# Altium PCB Display_System_pcb.PcbDoc (part 3 of 3)
Units mm, origin at the board's own origin, x right, y up, seen from the top; angles counter-clockwise.
Board outline 72.5 x 81 mm, 4 copper layers (Top Layer, VCC, GND, Bottom Layer); 86 components, 79 nets, 327 pads, 149 vias.
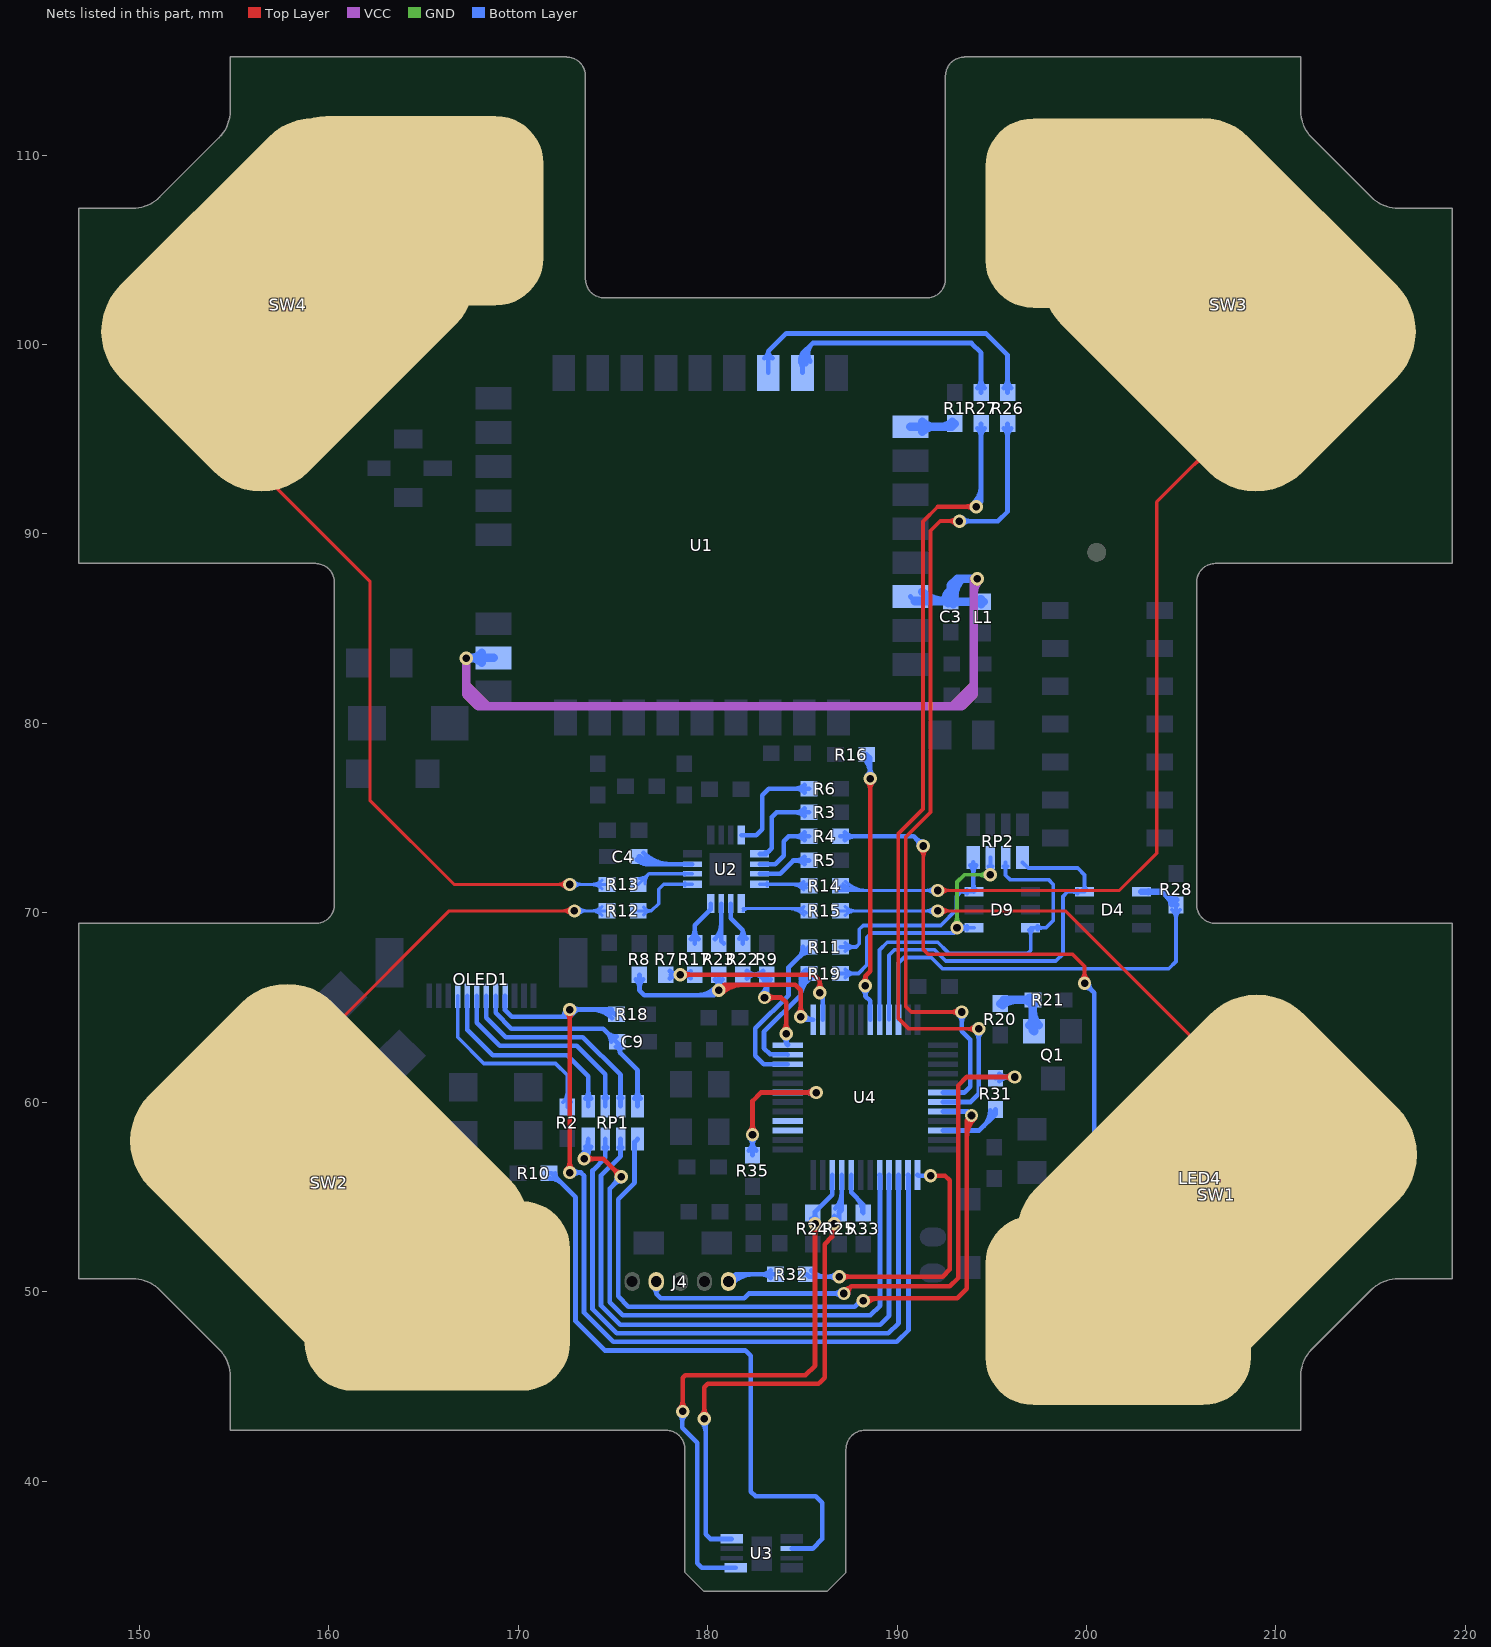
[diagram p5: the nets of this part, all layers, seen from the top]

## Via types
v1: diameter 0.7, hole 0.4, Top Layer to Bottom Layer, tented both sides, 149 vias

## Nets (pads, with @x,y where several pads share a name; then routed paths per layer and width w, separated by ;. In a path a pad name is that pad's centre, name@x,y a point inside that pad or via, vN(x,y) a via of type N, cw(c..) or ccw(c..) an arc to the next point about the centre after c; other vN are vias at no path point) (continued)
NetLED4_1: LED4.1 R4.2 | length 43.8
  Top Layer w0.2: v1@191.212,73.356 cw(c190.785,72.929) 191.389,72.929 cw(c191.993,72.929) v1@191.566,73.356 ; v1(191.389,73.533) 191.389,68.072 191.643,67.818 199.263,67.818 199.898,67.183 v1(199.898,66.294) ; v1@199.721,66.471 ccw(c199.294,66.898) 199.898,66.898 ccw(c200.502,66.898) v1@200.075,66.471
  Bottom Layer w0.25: R4.2@187.007,74.041 190.881,74.041 v1(191.389,73.533) ; R4.2@187.245,73.842 cw(c187.725,73.362) 187.725,74.041 cw(c187.725,74.72) R4.2@187.245,74.24 ; v1@191.164,73.533 ccw(c190.621,73.533) 191.005,73.917 ccw(c191.389,74.301) v1@191.389,73.758 ; v1@199.898,66.069 cw(c199.898,65.526) 200.282,65.91 cw(c200.666,66.294) v1@200.123,66.294 ; v1(199.898,66.294) 200.406,65.786 200.406,58.42 200.66,58.166 207.391,58.166 207.772,57.785 LED4.1@207.772,56.134 ; LED4.1@207.411,56.495 ccw(c206.541,57.365) 207.772,57.365 ccw(c209.003,57.365) LED4.1@208.133,56.495
NetOLED1_6: OLED1.6 RP1.3 | length 11.6
  Bottom Layer w0.25: OLED1.6@168.315,65.62 168.315,64.476 169.349,63.442 173.413,63.442 175.406,61.449 RP1.3@175.406,59.793 ; RP1.3@175.318,60.231 ccw(c175.104,60.445) 175.406,60.445 ccw(c175.708,60.445) RP1.3@175.494,60.231
NetOLED1_7: OLED1.7 RP1.2 | length 11.5
  Bottom Layer w0.25: OLED1.7@167.815,65.62 167.815,64.214 169.037,62.992 173.101,62.992 174.606,61.487 RP1.2@174.606,59.793 ; RP1.2@174.518,60.231 ccw(c174.304,60.445) 174.606,60.445 ccw(c174.908,60.445) RP1.2@174.694,60.231
NetOLED1_8: OLED1.8 RP1.1 | length 11.6
  Bottom Layer w0.25: OLED1.8@167.315,65.62 167.315,63.825 168.656,62.484 172.593,62.484 173.706,61.371 RP1.1@173.706,59.793 ; RP1.1@173.547,60.202 ccw(c173.163,60.586) 173.706,60.586 ccw(c174.249,60.586) RP1.1@173.865,60.202
NetOLED1_9: OLED1.9 R2.2 | length 15.8
  Bottom Layer w0.152: 168.549,62.083 171.978,62.083 172.466,61.595
  Bottom Layer w0.2: OLED1.9@166.815,65.62 166.815,63.436 168.192,62.059 171.978,62.059 172.593,61.444 R2.2@172.593,59.753 ; R2.2@172.376,60.008 ccw(c171.853,60.531) 172.593,60.531 ccw(c173.333,60.531) R2.2@172.81,60.008
NetQ1_1: Q1.1 R20.1 R21.2 | length 6.9
  Bottom Layer w0.45: R20.1@195.453,65.215 195.643,65.405 R21.2@197.167,65.405 197.167,63.817 Q1.1@197.231,63.754 ; R20.1@195.581,65.124 cw(c196.259,64.447) 196.259,65.405 ; Q1.1@196.986,64.063 ccw(c196.548,64.501) 197.167,64.501 ; R21.2@197.001,65.277 ccw(c196.691,64.967) 196.691,65.405 ccw(c196.691,65.843) R21.2@197.001,65.533 ; R21.2@197.039,65.277 cw(c196.73,64.967) 197.167,64.967 cw(c197.605,64.967) R21.2@197.296,65.277 ; 197.167,64.807 ccw(c198.221,64.807) Q1.1@197.476,64.063
NetR1_2: R1.2 U1.18 | length 4.5
  Bottom Layer w0.45: U1.18@190.705,95.658 192.876,95.658 R1.2@193.04,95.822 ; U1.18@191.32,95.393 cw(c191.96,94.753) 191.96,95.658 cw(c191.96,96.563) U1.18@191.32,95.923 ; 192.299,95.658 ccw(c192.299,96.524) R1.2@192.912,95.912
NetR12_1: pad.0@165.735,49.784 R12.1 SW2.1 | length 20.5
  Top Layer w0.17: SW2.1@160.02,63.754 166.37,70.104 v1(172.974,70.104) ; v1@172.787,69.917 ccw(c172.334,69.464) 172.334,70.104 ccw(c172.334,70.744) v1@172.787,70.291
  Bottom Layer w0.17: v1(172.974,70.104) R12.1@174.689,70.104 ; v1@173.161,69.917 cw(c173.614,69.464) 173.614,70.104 cw(c173.614,70.744) v1@173.161,70.291 ; R12.1@174.423,69.877 ccw(c173.874,69.328) 173.874,70.104 ccw(c173.874,70.88) R12.1@174.423,70.331
NetR12_2: R12.2 U2.1 | length 5.3
  Bottom Layer w0.17: R12.2@176.339,70.104 177.038,70.104 ; R12.2@176.631,69.906 cw(c177.038,69.586) 177.038,70.104 ; R12.2@176.631,70.302 ccw(c177.038,70.622) 177.038,70.104 ; U2.1@178.816,71.433 ccw(c178.619,71.237) 178.619,71.515 ccw(c178.619,71.792) U2.1@178.816,71.596 ; U2.1@179.197,71.515 177.687,71.515 177.419,71.247 177.419,70.485 177.038,70.104
NetR13_1: pad.0@164.338,107.061 R13.1 SW4.1 | length 38.7
  Top Layer w0.17: SW4.1@155.385,94.297 161.671,88.011 162.179,87.503 162.179,76.454 162.179,75.946 166.624,71.501 v1(172.72,71.501) ; v1@172.533,71.314 ccw(c172.08,70.861) 172.08,71.501 ccw(c172.08,72.141) v1@172.533,71.688
  Bottom Layer w0.17: v1(172.72,71.501) R13.1@174.689,71.501 ; v1@172.907,71.314 cw(c173.36,70.861) 173.36,71.501 cw(c173.36,72.141) v1@172.907,71.688 ; R13.1@174.423,71.274 ccw(c173.874,70.725) 173.874,71.501 ccw(c173.874,72.277) R13.1@174.423,71.728
NetR13_2: R13.2 U2.2 | length 4.5
  Bottom Layer w0.17: R13.2@176.339,71.501 176.903,72.064 ; R13.2@176.378,71.822 ccw(c176.378,72.506) 176.861,72.023 ; R13.2@176.698,71.522 cw(c177.401,71.567) 176.903,72.064 ; U2.2@178.801,72.019 ccw(c178.69,71.908) 178.69,72.064 ccw(c178.69,72.221) U2.2@178.801,72.11 ; U2.2@179.197,72.064 176.903,72.064
NetR14_1: R14.1 U2.12 | length 4.8
  Bottom Layer w0.17: U2.12@182.753,71.515 R14.1@185.356,71.515 ; U2.12@183.134,71.433 cw(c183.331,71.237) 183.331,71.515 cw(c183.331,71.792) U2.12@183.134,71.596 ; 184.357,71.515 cw(c184.357,70.476) R14.1@185.091,71.21 ; 184.728,71.515 ccw(c184.728,72.028) R14.1@185.091,71.665 ; 184.767,71.515 cw(c184.767,70.886) R14.1@185.211,71.33
NetR14_2: pad.0@201.676,106.934 R14.2 SW3.1 | length 49
  Top Layer w0.17: v1(192.151,71.183) 201.739,71.183 203.708,73.152 203.708,91.694 SW3.1@206.058,94.043 ; v1@192.338,70.996 cw(c192.791,70.544) 192.791,71.183 cw(c192.791,71.823) v1@192.338,71.371 ; 205.592,93.578 cw(c206.745,92.425) SW3.1@207.162,94.001 ; 205.801,93.787 cw(c206.832,92.756) SW3.1@207.206,94.166 ; SW3.1@206.01,93.996 cw(c206.92,93.086) SW3.1@207.249,94.33
  Bottom Layer w0.17: R14.2@186.817,71.183 v1@192.088,71.183 ; R14.2@187.032,71.424 ccw(c187.614,72.006) 187.614,71.183 ; R14.2@187.153,71.545 ccw(c188.024,72.416) 188.024,71.183 ; R14.2@187.273,71.665 ccw(c188.435,72.827) 188.435,71.183 ; v1@191.964,70.996 ccw(c191.511,70.544) 191.511,71.183 ccw(c191.511,71.823) v1@191.964,71.371
NetR15_1: R15.1 U2.13 | length 5.4
  Bottom Layer w0.17: U2.13@181.864,70.231 R15.1@185.039,70.231 ; U2.13@181.868,70.104 cw(c182.176,69.796) 182.176,70.231 ; 184.236,70.231 cw(c184.236,69.021) R15.1@185.091,69.877 ; 184.646,70.231 cw(c184.646,69.432) R15.1@185.211,69.997 ; 184.849,70.231 ccw(c184.849,70.573) R15.1@185.091,70.331
NetR15_2: pad.0@201.676,49.022 R15.2 SW1.1 | length 34.7
  Top Layer w0.17: v1(192.151,70.104) 198.882,70.104 SW1.1@207.609,61.377 ; v1@192.338,69.917 cw(c192.791,69.464) 192.791,70.104 cw(c192.791,70.744) v1@192.338,70.291
  Top Layer w0.25: SW1.1@206.757,54.692 SW1.1@206.83,54.692
  Top Layer w0.45: SW1.1@206.808,54.605 206.885,54.605 207.609,55.329 SW1.1@207.609,61.377
  Bottom Layer w0.17: R15.2@187.007,70.104 v1(192.151,70.104) ; R15.2@187.273,69.877 cw(c187.822,69.328) 187.822,70.104 cw(c187.822,70.88) R15.2@187.273,70.331 ; v1@191.964,69.917 ccw(c191.511,69.464) 191.511,70.104 ccw(c191.511,70.744) v1@191.964,70.291
NetR17_1: R17.1 U2.16 | length 3.5
  Bottom Layer w0.25: R17.1@179.125,68.627 ccw(c178.645,69.107) 179.324,69.107 ccw(c180.003,69.107) R17.1@179.523,68.627 ; R17.1@179.324,68.389 179.324,69.342 180.163,70.181 U2.16@180.163,70.485
NetR22_2: R22.2 U2.14 | length 3.4
  Bottom Layer w0.25: U2.14@181.229,70.485 181.229,69.723 181.864,69.088 ; R22.2@181.669,68.631 ccw(c181.23,69.088) 181.864,69.088 ; R22.2@181.864,68.389 181.864,69.088 ; R22.2@182.059,68.631 cw(c182.498,69.088) 181.864,69.088
NetR23_2: R23.2 U2.15 | length 3
  Bottom Layer w0.25: R23.2@180.395,68.627 ccw(c179.608,69.414) 180.721,69.414 ; U2.15@180.721,70.485 180.721,68.516 R23.2@180.848,68.389
NetR26_2: R26.2 U1.15 | length 18.5
  Bottom Layer w0.25: U1.15@182.987,99.28 ccw(c182.8,99.639) 183.205,99.639 ; U1.15@183.205,98.508 183.205,99.639 ; U1.15@183.423,99.28 cw(c183.61,99.639) 183.205,99.639 ; R26.2@195.635,97.71 ccw(c195.155,98.19) 195.834,98.19 ccw(c196.513,98.19) R26.2@196.033,97.71 ; R26.2@195.834,97.472 195.834,99.441 194.691,100.584 184.15,100.584 183.205,99.639
NetR27_2: R27.2 U1.16 | length 16.9
  Bottom Layer w0.25: U1.16@184.983,98.846 cw(c185.536,99.163) 185.085,99.614 ; U1.16@185.005,98.508 185.005,99.534 185.547,100.076 ; U1.16@185.2,98.97 cw(c185.829,99.332) 185.316,99.845 ; U1.16@185.417,99.095 cw(c186.123,99.5) 185.547,100.076 ; R27.2@194.238,97.71 ccw(c193.758,98.19) 194.437,98.19 ccw(c195.116,98.19) R27.2@194.636,97.71 ; R27.2@194.437,97.472 194.437,99.568 193.929,100.076 185.547,100.076
NetR31_2: R31.2 U4.34 | length 4.8
  Bottom Layer w0.25: U4.34@192.43,58.517 194.344,58.517 195.199,59.372 R31.2@195.199,59.627 ; 194.566,58.739 ccw(c193.717,59.588) R31.2@194.918,59.588 ; 194.993,59.166 ccw(c194.571,59.588) R31.2@195.168,59.588
NetR32_1: R32.1 U4.37 | length 16.9
  Top Layer w0.25: v1(186.944,50.8) 192.405,50.8 192.786,51.181 192.786,55.88 192.532,56.134 v1(191.77,56.134) ; v1@187.103,50.641 cw(c187.487,50.257) 187.487,50.8 cw(c187.487,51.343) v1@187.103,50.959
  Bottom Layer w0.25: R32.1@185.23,50.927 185.356,50.8 v1(186.944,50.8) ; R32.1@185.467,51.126 ccw(c186.254,51.913) 186.254,50.8 ; v1@186.785,50.641 ccw(c186.401,50.257) 186.401,50.8 ccw(c186.401,51.343) v1@186.785,50.959 ; U4.37@191.08,56.167 191.114,56.134 v1(191.77,56.134)
NetR33_2: R33.2 U4.44 | length 3.1
  Bottom Layer w0.25: U4.44@187.579,56.169 187.579,55.245 188.214,54.61 R33.2@188.214,54.165 ; 187.873,54.951 cw(c187.126,54.204) R33.2@188.183,54.204
NRST: R35.2 U4.7 | length 12.4
  Top Layer w0.25: v1@182.213,58.452 ccw(c181.829,58.836) 182.372,58.836 ccw(c182.915,58.836) v1@182.531,58.452 ; v1(182.372,58.293) 182.372,60.071 182.818,60.517 v1(185.739,60.517) ; v1@185.58,60.358 ccw(c185.196,59.974) 185.196,60.517 ccw(c185.196,61.061) v1@185.58,60.677
  Bottom Layer w0.25: R35.2@182.173,57.451 ccw(c181.693,57.931) 182.372,57.931 ccw(c183.051,57.931) R35.2@182.571,57.451 ; v1@182.213,58.134 cw(c181.829,57.75) 182.372,57.75 cw(c182.915,57.75) v1@182.531,58.134 ; R35.2@182.372,57.213 v1(182.372,58.293) ; U4.7@184.23,60.517 v1(185.739,60.517) ; v1@185.58,60.358 ccw(c185.196,59.974) 185.196,60.517 ccw(c185.196,61.061) v1@185.58,60.677
O_LED1: R3.1 U2.9 | length 5.8
  Bottom Layer w0.25: U2.9@182.753,73.114 183.096,73.114 183.388,73.406 183.388,75.057 183.642,75.311 R3.1@185.356,75.311 ; U2.9@183.053,73.19 ccw(c183.053,73.476) 183.255,73.273 ; R3.1@185.119,75.112 ccw(c184.639,74.632) 184.639,75.311 ccw(c184.639,75.99) R3.1@185.119,75.51
O_LED2: R4.1 U2.10 | length 4.7
  Bottom Layer w0.25: U2.10@182.753,72.565 183.563,72.565 184.023,73.025 184.023,73.787 184.277,74.041 R4.1@185.356,74.041 ; R4.1@185.119,73.842 ccw(c184.639,73.362) 184.639,74.041 ccw(c184.639,74.72) R4.1@185.119,74.24
O_LED3: R5.1 U2.11 | length 4
  Bottom Layer w0.25: U2.11@182.753,72.064 183.826,72.064 184.473,72.712 184.473,72.713 184.531,72.771 R5.1@185.356,72.771 ; R5.1@185.119,72.572 ccw(c184.639,72.092) 184.639,72.771 ccw(c184.639,73.45) R5.1@185.119,72.97
O_LED4: R6.1 U2.8 | length 6.7
  Bottom Layer w0.25: U2.8@181.787,74.105 182.562,74.105 182.88,74.422 182.88,76.2 183.238,76.558 R6.1@185.356,76.558 ; R6.1@185.119,76.359 ccw(c184.639,75.879) 184.639,76.558 ccw(c184.639,77.237) R6.1@185.119,76.757
OPT01: U4.4
OPT02: U4.3
RES: C9.1 OLED1.5 RP1.4 | length 14.3
  Bottom Layer w0.25: OLED1.5@168.815,65.62 168.815,64.724 169.647,63.892 174.487,63.892 175.387,62.992 175.387,62.611 176.306,61.692 RP1.4@176.306,59.793 ; 174.693,63.686 ccw(c175.196,64.189) C9.1@175.196,63.477 ; 174.726,63.653 cw(c174.268,63.196) C9.1@174.915,63.196 ; C9.1@175.163,62.937 cw(c175.022,62.6) 175.387,62.6 ; C9.1@175.387,62.793 cw(c175.676,62.793) C9.1@175.472,62.997 ; RP1.4@176.147,60.202 ccw(c175.763,60.586) 176.306,60.586 ccw(c176.849,60.586) RP1.4@176.465,60.202
RS485_EN: D9.6 RP2.2 U4.20 | length 21.7
  Bottom Layer w0.2: U4.20@189.08,64.367 189.08,68.049 189.484,68.453 192.151,68.453 192.659,67.945 192.748,67.856 196.888,67.856 197.056,68.024 197.056,68.659 D9.6@197.056,69.215 197.866,69.215 198.247,69.596 198.247,71.501 197.993,71.755 195.961,71.755 195.726,71.99 RP2.2@195.726,72.668 ; RP2.2@195.62,72.466 cw(c195.364,72.21) 195.726,72.21 cw(c196.088,72.21) RP2.2@195.832,72.466 ; D9.6@196.95,69.109 cw(c196.694,68.853) 197.056,68.853 cw(c197.418,68.853) D9.6@197.162,69.109 ; D9.6@197.412,69.109 cw(c197.668,68.853) 197.668,69.215 cw(c197.668,69.577) D9.6@197.412,69.321
RS485_RX: D4.4 R28.2 U4.22 | length 29.1
  Bottom Layer w0.2: U4.22@190.08,64.367 190.08,67.36 190.373,67.653 191.808,67.653 192.405,67.056 204.343,67.056 204.724,67.437 R28.2@204.724,70.421 204.025,71.12 D4.4@202.898,71.12 ; D4.4@203.254,71.014 cw(c203.51,70.758) 203.51,71.12 cw(c203.51,71.482) D4.4@203.254,71.226 ; 204.136,71.01 ccw(c204.724,71.598) R28.2@204.724,70.766 ; 204.228,70.918 cw(c203.77,70.46) R28.2@204.418,70.46 ; R28.2@204.507,70.167 cw(c203.984,69.644) 204.724,69.644 cw(c205.464,69.644) R28.2@204.941,70.167
  Bottom Layer w0.35: D4.4@202.898,71.12 204.025,71.12 R28.2@204.724,70.421 ; 204.264,70.882 ccw(c204.724,71.342) R28.2@204.724,70.691 ; R28.2@204.356,70.79 cw(c204.026,70.46) R28.2@204.493,70.46
RS485_TX: D4.3 RP2.1 U4.21 | length 23
  Bottom Layer w0.2: U4.21@189.58,64.367 189.58,67.768 189.865,68.053 191.974,68.053 192.571,67.456 198.374,67.456 198.755,67.837 198.755,68.453 198.755,70.866 199.004,71.115 D4.3@199.898,71.115 199.898,72.009 199.536,72.371 196.923,72.371 RP2.1@196.626,72.668 ; D4.3@199.542,71.009 ccw(c199.286,70.753) 199.286,71.115 ccw(c199.286,71.477) D4.3@199.542,71.221 ; D4.3@199.792,71.221 ccw(c199.536,71.477) 199.898,71.477 ccw(c200.26,71.477) D4.3@200.004,71.221
SHT30_RST: R10.1 U3.6 | length 34.4
  Bottom Layer w0.25: R10.1@171.641,56.261 171.77,56.261 173.032,54.999 173.032,48.456 174.578,46.91 181.991,46.91 182.285,46.616 182.285,39.457 182.532,39.21 185.707,39.21 186.055,38.862 186.055,36.957 185.547,36.449 U3.6@184.437,36.449 ; R10.1@171.679,55.98 cw(c171.679,55.081) 172.314,55.716 ; R10.1@171.96,56.261 ccw(c172.42,56.261) 172.095,55.936
SHT30_SCL: R25.2 U3.4 U4.45 | length 32
  Top Layer w0.25: v1@179.673,43.466 ccw(c179.289,43.85) 179.832,43.85 ccw(c180.375,43.85) v1@179.991,43.466 ; v1@179.832,43.561 179.832,44.958 180.017,45.143 185.859,45.143 ; 185.928,45.212 186.182,45.466 186.182,52.514 186.563,52.895 v1@186.563,53.594 ; 186.563,52.884 cw(c187.23,52.884) v1@186.826,53.415
  Bottom Layer w0.25: v1@179.673,43.148 cw(c179.122,42.597) 179.901,42.597 ; 179.901,42.93 cw(c180.209,42.93) v1@179.991,43.148 ; v1@179.901,43.307 179.901,37.211 180.155,36.957 U3.4@181.283,36.957 ; v1@186.563,53.594 R25.2@186.944,53.975 ; v1@186.639,53.67 ccw(c186.437,53.873) R25.2@186.693,54.001 ; R25.2@186.651,53.816 ccw(c186.589,54.165) R25.2@186.944,54.165 ; v1@186.694,53.569 ccw(c186.642,53.867) R25.2@186.944,53.867 ; R25.2@186.724,53.755 cw(c186.944,53.535) R25.2@186.944,53.846 ; R25.2@186.745,54.403 ccw(c185.935,55.212) 187.08,55.212 ; v1@186.894,53.689 cw(c187.123,53.796) R25.2@186.944,53.975 ; R25.2@186.922,54.226 ccw(c186.539,54.609) R25.2@187.08,54.609 ; U4.45@187.08,56.167 187.08,54.302 R25.2@186.944,54.165 ; R25.2@186.944,53.975 R25.2@186.944,54.165
  other v1: 179.832,43.307 186.69,53.594
SHT30_SDA: R24.2 U3.1 U4.46 | length 33.5
  Top Layer w0.25: v1@178.53,43.847 ccw(c178.146,44.231) 178.689,44.231 ccw(c179.232,44.231) v1@178.848,43.847 ; v1(178.689,43.688) 178.689,45.466 178.816,45.593 185.166,45.593 185.674,46.101 v1@185.674,53.34 ; v1@185.515,53.435 cw(c185.131,53.051) 185.674,53.051 cw(c186.217,53.051) v1@185.833,53.435
  Bottom Layer w0.25: v1@178.53,43.529 cw(c178.211,43.21) 178.662,43.21 ; 178.662,43.08 cw(c179.297,43.08) v1@178.848,43.529 ; v1@178.662,43.688 178.662,42.826 179.451,42.037 179.451,35.687 179.705,35.433 U3.1@181.483,35.433 ; R24.2@185.466,53.858 cw(c185.383,53.579) v1@185.674,53.579 ; R24.2@185.515,53.753 ccw(c185.131,54.137) 185.674,54.137 ccw(c186.217,54.137) R24.2@185.833,53.753 ; v1(185.674,53.594) 185.674,54.23 186.58,55.137 U4.46@186.58,56.167
SPI_CLK: RP1.7 U4.39 | length 34.5
  Bottom Layer w0.25: RP1.7@174.518,57.625 cw(c174.304,57.411) 174.606,57.411 cw(c174.908,57.411) RP1.7@174.694,57.625 ; RP1.7@174.606,58.063 174.606,57.073 173.932,56.399 173.932,49.081 175.203,47.81 189.542,47.81 190.08,48.348 U4.39@190.08,56.167
SPI_CS: OLED1.4 R18.2 U4.38 | length 57.1
  Top Layer w0.25: v1@172.561,56.456 ccw(c172.177,56.84) 172.72,56.84 ccw(c173.263,56.84) v1@172.879,56.456 ; v1@172.561,64.738 cw(c172.177,64.354) 172.72,64.354 cw(c173.263,64.354) v1@172.879,64.738 ; v1(172.72,56.296) v1(172.72,64.897)
  Bottom Layer w0.25: OLED1.4@169.315,65.62 169.315,64.86 169.659,64.516 172.339,64.516 ; v1@172.495,64.896 cw(c171.962,64.893) 172.339,64.516 ; v1@172.611,64.7 cw(c172.51,64.516) 172.72,64.516 ; v1@172.719,64.672 ccw(c172.716,64.139) 172.339,64.516 ; v1(172.72,56.296) 173.32,56.296 173.482,56.134 173.482,48.895 175.017,47.36 189.981,47.36 190.605,47.984 190.605,56.142 U4.38@190.58,56.167 ; v1@172.829,64.7 ccw(c172.93,64.516) 172.72,64.516 ; v1@172.879,56.137 cw(c173.263,55.753) 173.263,56.296 cw(c173.263,56.84) v1@172.879,56.456 ; v1@172.879,64.738 cw(c173.263,64.354) 173.263,64.897 cw(c173.263,65.44) v1@172.879,65.056 ; 173.101,64.897 172.72,64.516 ; 173.866,64.897 cw(c173.866,63.35) R18.2@174.959,64.444 ; 174.469,64.897 cw(c174.469,63.954) R18.2@175.136,64.621 ; R18.2@174.942,64.897 v1(172.72,64.897) 172.339,64.516 ; 172.339,64.516 172.72,64.516
SPI_DC: RP1.6 U4.40 | length 32.9
  Bottom Layer w0.25: RP1.6@175.318,57.625 cw(c175.104,57.411) 175.406,57.411 cw(c175.708,57.411) RP1.6@175.494,57.625 ; RP1.6@175.406,58.063 175.406,57.169 174.382,56.145 174.382,49.268 175.39,48.26 189.103,48.26 189.58,48.737 U4.40@189.58,56.167
SPI_RES: RP1.5 U4.32 | length 41.1
  Top Layer w0.25: v1@188.214,49.657 193.167,49.657 193.675,50.165 193.675,59.055 v1(193.929,59.309) ; v1@188.373,49.371 cw(c189.064,48.68) 189.064,49.657 ; 193.675,58.153 cw(c195.085,58.153) v1@194.088,59.15 ; 193.675,58.756 cw(c194.482,58.756) v1@193.911,59.327
  Bottom Layer w0.25: RP1.5@176.306,58.063 176.149,57.906 176.149,55.753 175.282,54.886 175.282,49.762 175.826,49.218 187.775,49.218 v1@188.214,49.657 ; U4.32@192.43,59.517 193.721,59.517 v1(193.929,59.309)
  other v1: 188.214,49.53
SPI_SDA: RP1.8 U4.41 | length 37
  Top Layer w0.25: v1(173.482,57.023) 174.498,57.023 v1(175.451,56.07) ; v1@173.641,56.864 cw(c174.025,56.48) 174.025,57.023 cw(c174.025,57.566) v1@173.641,57.182 ; v1@175.225,56.07 ccw(c174.682,56.07) 175.066,56.455 ccw(c175.451,56.839) v1@175.451,56.296
  Bottom Layer w0.25: v1@173.328,57.187 ccw(c172.502,58.063) RP1.8@173.706,58.063 173.706,57.247 v1(173.482,57.023) ; v1@173.499,57.005 ccw(c173.048,57.484) RP1.8@173.706,57.484 ; RP1.8@173.547,57.654 cw(c173.163,57.27) 173.706,57.27 cw(c174.249,57.27) RP1.8@173.865,57.654 ; v1@175.225,56.07 cw(c174.682,56.07) 175.066,55.686 cw(c175.451,55.302) v1@175.451,55.845 ; v1(175.451,56.07) 174.832,55.452 174.832,49.454 175.518,48.768 188.595,48.768 189.105,49.278 189.105,56.142 U4.41@189.08,56.167
SWCLK: J4.5 R32.2 | length 5.9
  Bottom Layer w0.25: J4.5@181.102,50.546 181.483,50.927 R32.2@183.706,50.927 ; J4.5@181.12,50.628 cw(c181.841,49.907) 181.841,50.927 ; J4.5@181.296,50.452 cw(c182.444,49.304) 182.444,50.927 ; R32.2@183.341,50.728 ccw(c182.861,50.248) 182.861,50.927 ccw(c182.861,51.606) R32.2@183.341,51.126
SWDIO: J4.2 R31.1 | length 36.7
  Top Layer w0.25: v1(187.198,49.911) 187.579,50.292 ; v1@187.199,50.136 ccw(c187.202,50.669) 187.579,50.292 ; v1@187.423,49.912 cw(c187.956,49.915) 187.579,50.292 ; v1@196.056,61.182 ccw(c195.672,60.798) 195.672,61.341 ccw(c195.672,61.884) v1@196.056,61.5 ; v1(196.215,61.341) 193.675,61.341 193.225,60.891 193.225,50.731 192.786,50.292 187.579,50.292
  Bottom Layer w0.25: J4.2@177.132,50.222 cw(c176.909,49.911) 177.292,49.911 ; J4.2@177.292,50.546 177.292,49.911 ; J4.2@177.452,50.222 ccw(c177.675,49.911) 177.292,49.911 ; v1@187.039,49.752 ccw(c186.655,49.368) 186.655,49.911 ccw(c186.655,50.454) v1@187.039,50.07 ; v1(187.198,49.911) 182.176,49.911 181.933,49.668 177.535,49.668 177.292,49.911 ; R31.1@195.199,61.277 195.262,61.341 v1(196.215,61.341) ; R31.1@195.398,61.117 cw(c195.94,60.575) v1@195.94,61.341 ; R31.1@195.398,61.515 ccw(c195.817,61.934) 195.817,61.341 ; v1@196.056,61.182 ccw(c195.672,60.798) 195.672,61.341 ccw(c195.672,61.884) v1@196.056,61.5
T_SCL: R8.2 R23.1 U4.13 | length 20.6
  Top Layer w0.25: v1@180.576,65.931 cw(c181.243,65.264) 181.243,66.207 ; v1(180.594,65.913) 180.888,66.207 184.618,66.207 184.912,65.913 v1(184.912,64.516) ; v1@180.753,65.754 cw(c181.847,64.66) 181.847,66.207 ; v1@184.753,64.675 ccw(c184.369,65.059) 184.912,65.059 ccw(c185.455,65.059) v1@185.071,64.675
  Bottom Layer w0.25: R8.2@176.204,66.501 cw(c175.724,66.021) 176.403,66.021 cw(c177.082,66.021) R8.2@176.602,66.501 ; R8.2@176.403,66.739 176.403,65.913 176.657,65.659 180.34,65.659 v1(180.594,65.913) R23.1@180.594,66.739 ; 179.438,65.659 ccw(c179.438,67.069) 180.435,66.072 ccw(c180.051,66.456) 180.594,66.456 ccw(c181.137,66.456) v1@180.753,66.072 ; 180.041,65.659 ccw(c180.041,66.466) v1@180.612,65.895 ; R23.1@180.395,66.501 cw(c179.915,66.021) 180.594,66.021 cw(c181.273,66.021) R23.1@180.793,66.501 ; v1@185.061,64.367 U4.13@185.58,64.367 cw(c185.58,64.927) v1@185.104,64.634
T_SDA: R9.2 R22.1 U4.12 | length 12.8
  Top Layer w0.25: v1(183.007,65.532) 183.896,65.532 184.15,65.278 v1(184.15,63.627) ; v1@183.166,65.373 cw(c183.55,64.989) 183.55,65.532 cw(c183.55,66.075) v1@183.166,65.691 ; v1@183.991,63.786 ccw(c183.607,64.17) 184.15,64.17 ccw(c184.693,64.17) v1@184.309,63.786
  Bottom Layer w0.25: R22.1@181.864,66.739 R9.2@183.134,66.739 183.134,65.659 v1(183.007,65.532) ; R22.1@182.063,66.54 cw(c182.543,66.059) 182.543,66.739 cw(c182.543,67.418) R22.1@182.063,66.937 ; v1@182.848,65.691 ccw(c182.157,66.382) R9.2@183.134,66.382 ; R9.2@182.935,66.501 cw(c182.455,66.021) 183.134,66.021 cw(c183.813,66.021) R9.2@183.333,66.501 ; R9.2@182.935,66.54 ccw(c182.455,66.059) 182.455,66.739 ccw(c182.455,67.418) R9.2@182.935,66.937 ; v1@183.994,63.465 cw(c183.64,63.098) U4.12@184.15,63.098 ; 184.15,63.272 ccw(c184.485,63.272) U4.12@184.248,63.035 ; v1(184.15,63.627) U4.12@184.15,63.098 ; U4.12@184.23,63.017 U4.12@184.15,63.098 ; v1@184.306,63.465 ccw(c184.66,63.098) U4.12@184.15,63.098
TCM_+3.3V: C3.2 L1.2 U1.2 U1.23 | length 60.5
  VCC w0.45: v1(167.259,83.439) 167.259,82.042 ; 168.402,80.899 167.259,82.042 ; 194.056,86.899 cw(c194.965,86.899) v1@194.322,87.542 ; v1(194.234,87.63) 194.056,87.63 194.056,82.042 ; 167.259,82.042 167.259,81.534 167.894,80.899 192.913,80.899 ; 192.913,80.899 194.056,82.042 ; 192.913,80.899 193.421,80.899 194.056,81.534 194.056,82.042
  Bottom Layer w0.25: U1.23@190.705,86.694 U1.23@190.937,86.462 ; C3.2@192.836,86.462 194.526,86.462 L1.2@194.564,86.423 ; C3.2@193.035,86.263 cw(c193.515,85.782) 193.515,86.462 cw(c193.515,87.141) C3.2@193.035,86.661 ; L1.2@194.365,86.263 ccw(c193.885,85.782) 193.885,86.462 ccw(c193.885,87.141) L1.2@194.365,86.661
  Bottom Layer w0.45: v1(167.259,83.439) 167.278,83.458 U1.2@168.705,83.458 ; U1.2@168.09,83.193 ccw(c167.45,82.553) 167.45,83.458 ccw(c167.45,84.363) U1.2@168.09,83.723 ; U1.23@190.937,86.462 C3.2@192.836,86.462 ; U1.23@191.32,86.959 ccw(c192.521,88.159) C3.2@192.521,86.462 ; C3.2@192.568,86.476 cw(c193.161,86.529) 192.74,86.949 ; C3.2@192.708,86.333 ccw(c192.398,86.024) 192.398,86.462 ccw(c192.398,86.9) C3.2@192.708,86.59 ; C3.2@192.964,86.295 cw(c193.274,85.986) 193.274,86.423 cw(c193.274,86.861) C3.2@192.964,86.552 ; C3.2@193.017,86.516 cw(c194.41,86.641) 193.421,87.63 192.836,87.045 C3.2@192.836,86.462 ; v1(194.234,87.63) 193.167,87.63 192.836,87.299 C3.2@192.836,86.462 ; L1.2@194.436,86.295 ccw(c194.126,85.986) 194.126,86.423 ccw(c194.126,86.861) L1.2@194.436,86.552 ; L1.2@194.564,86.423 192.874,86.423 C3.2@192.836,86.462 ; 192.836,86.938 ccw(c193.274,86.938) 192.964,86.628 cw(c193.274,86.938) 192.836,86.938 ; 192.836,86.938 cw(c192.398,86.938) 192.708,86.628 ccw(c192.398,86.938) 192.836,86.938
TCM_RESET: R16.2 U4.19 | length 18.9
  Top Layer w0.25: v1@188.175,66.319 ccw(c187.865,66.66) 188.326,66.66 ; v1(188.326,66.152) 188.326,66.66 ; v1@188.421,76.93 cw(c188.037,76.546) 188.58,76.546 cw(c189.124,76.546) v1@188.739,76.93 ; v1@188.478,66.319 cw(c188.787,66.66) 188.326,66.66 ; v1(188.58,77.089) 188.58,66.914 188.326,66.66
  Bottom Layer w0.25: v1@188.167,65.993 cw(c187.783,65.609) 188.326,65.609 ; R16.2@188.244,78.16 cw(c187.431,77.347) v1@188.58,77.347 ; v1(188.326,66.152) 188.326,65.609 ; R16.2@188.404,78.359 188.58,78.183 v1(188.58,77.089) ; v1@188.421,77.248 ccw(c188.037,77.632) 188.58,77.632 ccw(c189.124,77.632) v1@188.739,77.248 ; R16.2@188.42,78.337 cw(c188.034,77.951) 188.58,77.951 ; v1@188.485,65.993 ccw(c188.87,65.609) 188.326,65.609 ; U4.19@188.58,64.367 188.58,65.355 188.326,65.609
TCM_RXD: R27.1 U4.31 | length 49.9
  Top Layer w0.2: 192.151,91.44 191.37,90.659 191.37,75.477 190.06,74.166 190.06,64.448 190.627,63.881 v1(194.31,63.881) ; v1@194.133,63.704 ccw(c193.706,63.277) 193.706,63.881 ccw(c193.706,64.485) v1@194.133,64.058
  Top Layer w0.25: 192.151,91.44 v1(194.183,91.44) ; v1@194.024,91.281 ccw(c193.64,90.897) 193.64,91.44 ccw(c193.64,91.983) v1@194.024,91.599
  Bottom Layer w0.25: U4.31@192.43,60.017 193.875,60.017 194.31,60.452 v1(194.31,63.881) v1@194.31,64.008 ; v1@194.024,91.599 ccw(c193.027,92.596) 194.437,92.596 ; v1@194.151,63.722 cw(c193.767,63.338) 194.31,63.338 cw(c194.853,63.338) v1@194.469,63.722 ; v1(194.183,91.44) 194.437,91.694 R27.1@194.437,95.822 ; v1@194.201,91.422 ccw(c193.63,91.993) 194.437,91.993 ; R27.1@194.238,95.584 cw(c193.758,95.104) 194.437,95.104 cw(c195.116,95.104) R27.1@194.636,95.584
TCM_TXD: R26.1 U4.30 | length 48.2
  Top Layer w0.2: v1@193.117,90.501 ccw(c192.69,90.074) 192.69,90.678 ccw(c192.69,91.282) v1@193.117,90.855 ; v1@193.244,64.593 ccw(c192.817,64.166) 192.817,64.77 ccw(c192.817,65.374) v1@193.244,64.947 ; v1(193.294,90.678) 192.278,90.678 191.77,90.17 191.77,75.311 190.46,74.001 190.46,65.064 190.754,64.77 v1(193.421,64.77)
  Bottom Layer w0.25: U4.30@192.43,60.517 193.544,60.517 193.86,60.833 193.86,63.315 193.421,63.754 v1(193.421,64.77) ; v1@193.262,64.611 cw(c192.878,64.227) 193.421,64.227 cw(c193.964,64.227) v1@193.58,64.611 ; v1(193.294,90.678) 195.326,90.678 195.834,91.186 R26.1@195.834,95.822 ; v1@193.453,90.519 cw(c193.837,90.135) 193.837,90.678 cw(c193.837,91.221) v1@193.453,90.837 ; R26.1@195.635,95.584 cw(c195.155,95.104) 195.834,95.104 cw(c196.513,95.104) R26.1@196.033,95.584
TOUCH_CMOD: C4.2 U2.3 | length 6.5
  Bottom Layer w0.25: C4.2@176.261,72.82 ccw(c176.879,73.438) 176.879,72.565 ; C4.2@176.378,72.975 176.788,72.565 U2.3@179.197,72.565 ; C4.2@176.438,72.997 ccw(c177.483,74.042) 177.483,72.565 ; C4.2@176.615,73.174 ccw(c178.086,74.645) 178.086,72.565
TOUCH_INT1: R7.2 R17.2 U4.14 | length 16.2
  Top Layer w0.25: v1@178.689,66.739 185.611,66.739 185.928,66.421 v1(185.928,65.786) ; v1@178.721,66.579 cw(c179.105,66.195) 179.105,66.739 cw(c179.105,67.282) v1@178.721,66.898 ; v1@185.769,65.945 ccw(c185.385,66.329) 185.928,66.329 ccw(c186.471,66.329) v1@186.087,65.945
  Bottom Layer w0.25: R7.2@177.999,66.54 cw(c178.479,66.059) 178.479,66.739 cw(c178.479,67.418) R7.2@177.999,66.937 ; v1@178.395,66.587 ccw(c178.054,66.278) R7.2@178.054,66.739 ; v1@178.395,66.89 cw(c178.054,67.199) R7.2@178.054,66.739 ; v1@178.721,66.579 cw(c179.105,66.195) 179.105,66.739 cw(c179.105,67.282) v1@178.721,66.898 ; R17.2@179.116,66.549 ccw(c178.689,66.163) v1@178.689,66.739 ; R17.2@179.116,66.928 cw(c178.689,67.314) v1@178.689,66.739 ; R17.2@179.451,66.739 v1@178.689,66.739 ; v1(185.928,65.786) 186.08,65.634 U4.14@186.08,64.367 ; R7.2@178.054,66.739 v1@178.689,66.739
  other v1: 178.562,66.739
UART_EX_RX: R19.1 U4.11 | length 9
  Bottom Layer w0.25: U4.11@184.23,62.517 184.205,62.542 183.296,62.542 182.973,62.865 182.973,63.72 184.912,65.659 184.912,66.358 R19.1@185.356,66.802 ; 184.912,65.589 cw(c186.044,65.589) R19.1@185.463,66.561 ; 184.912,66.03 cw(c185.78,66.03) R19.1@185.335,66.775 ; R19.1@184.912,66.471 cw(c185.517,66.471) R19.1@185.206,66.99
UART_EX_RX1: D9.1 R19.2 RP2.3 | length 20.2
  GND w0.2: v1@192.99,69.392 ccw(c192.563,69.819) 193.167,69.819 ccw(c193.771,69.819) v1@193.344,69.392 ; v1(193.167,69.215) 193.167,71.628 193.548,72.009 v1(194.926,72.009) ; v1@194.749,71.832 ccw(c194.322,71.405) 194.322,72.009 ccw(c194.322,72.613) v1@194.749,72.186
  Bottom Layer w0.2: R19.2@187.007,66.802 187.96,66.802 188.406,67.248 188.406,68.707 188.641,68.942 193.021,68.942 193.294,69.215 D9.1@194.056,69.215 ; R19.2@187.262,66.585 cw(c187.785,66.062) 187.785,66.802 cw(c187.785,67.542) R19.2@187.262,67.019 ; v1@193.344,69.038 cw(c193.771,68.611) 193.771,69.215 cw(c193.771,69.819) v1@193.344,69.392 ; D9.1@193.7,69.109 ccw(c193.444,68.853) 193.444,69.215 ccw(c193.444,69.577) D9.1@193.7,69.321 ; v1@194.749,72.186 ccw(c194.322,72.613) 194.926,72.613 ccw(c195.53,72.613) v1@195.103,72.186 ; RP2.3@194.82,72.466 cw(c194.564,72.21) 194.926,72.21 cw(c195.288,72.21) RP2.3@195.032,72.466 ; v1(194.926,72.009) RP2.3@194.926,72.922
UART_EX_TX: R11.1 U4.10 | length 9.9
  Bottom Layer w0.25: U4.10@184.23,62.017 182.966,62.017 182.523,62.46 182.523,63.907 184.277,65.66 184.277,67.12 R11.1@185.356,68.199 ; 184.811,67.654 ccw(c184.266,68.199) R11.1@185.037,68.199 ; 184.903,67.746 cw(c185.318,67.33) R11.1@185.318,67.918
UART_EX_TX1: D9.3 R11.2 RP2.4 | length 13.6
  Bottom Layer w0.2: R11.2@187.007,68.199 187.833,68.199 188.006,68.372 188.006,69.134 188.214,69.342 192.308,69.342 193.144,70.177 193.144,70.866 193.393,71.115 D9.3@194.056,71.115 ; R11.2@187.262,67.982 cw(c187.785,67.459) 187.785,68.199 cw(c187.785,68.939) R11.2@187.262,68.416 ; D9.3@193.7,71.009 ccw(c193.444,70.753) 193.444,71.115 ccw(c193.444,71.477) D9.3@193.7,71.221
  Bottom Layer w0.25: RP2.4@193.867,72.513 cw(c193.483,72.129) 194.026,72.129 cw(c194.569,72.129) RP2.4@194.185,72.513 ; 194.026,71.489 ccw(c194.43,71.489) D9.3@194.144,71.203 ; RP2.4@194.026,72.668 194.026,71.145 D9.3@194.056,71.115
pads on no net: D4.1 D4.6 D9.4 J1.2 J1.5 J1.9 OLED1.2 OLED1.12 U1.3 U1.4 U1.8 U1.9 U1.10 U1.11 U1.12 U1.13 U1.14 U1.19 U1.20 U1.21 U1.22 U1.25 U1.29 U1.30 U1.32 U1.33 U1.34 U3.3 U4.15 U4.16 U4.17 U4.18 U4.25 U4.26 U4.27 U4.28 U4.29 U4.33 U4.42 U4.43

## Polygon pours and split planes (outlines as drawn)
GND on VCC "Top Layer-No Net 1" (hatched 90Degree grid 1 track 0.17, remove dead copper, pour order 1000): 167.64,97.917 198.374,97.917 204.597,91.435 204.597,64.315 200.279,59.817 167.386,59.817 162.179,65.241 162.179,92.228 167.64,97.917
GND on GND "Top Layer-No Net" (hatched 90Degree grid 0.68 track 0.17, remove dead copper, pour order 1005): 213.246,110.011 210.947,111.887 210.82,112.395 193.675,112.395 193.675,104.902 172.212,104.775 172.212,112.649 155.956,112.649 155.448,112.141 153.181,109.896 146.831,103.546 146.831,43.734 147.451,43.114 211.331,43.114 219.331,51.114 219.331,107.614
GND on Top Layer "Top Layer-No Net" (hatched 90Degree grid 1.143 track 0.178, remove dead copper, pour order 1005): 212.546,109.906 210.952,115.574 192.812,115.443 192.202,104.775 192.202,104.648 172.619,104.648 172.619,115.189 154.452,115.574 154.458,112.141 152.481,109.79 146.131,103.44 146.131,43.628 146.751,43.009 210.632,43.009 218.632,51.009 218.632,107.509

## Keep-outs
Keep-Out Layer:
  circle w0.1: c177.05,55.245 r0.75
  circle w0.127: c160.107,101.893 r1.1
  circle w0.127: c206.007,55.993 r1.1
  circle w0.127: c206.007,101.893 r1.1
  circle w0.127: c148.557,52.443 r0.8
  circle w0.127: c156.557,113.443 r0.8
  circle w0.127: c217.557,52.443 r0.8
  circle w0.127: c209.557,113.443 r0.8
  circle w0.127: c206.007,55.993 r1.1
  circle w0.127: c160.107,55.993 r1.1
  circle w0.127: c201.091,84.963 r0.55
  circle w0.127: c201.091,74.93 r0.55
  lines w0.127: 172.557,115.173 cw(c172.557,114.173) 173.557,114.173 173.557,103.455 ccw(c174.557,103.455) 174.557,102.455 191.557,102.455 ccw(c191.557,103.455) 192.557,103.455 192.557,114.173 cw(c193.557,114.173) 193.557,115.173 ; 172.557,115.193 154.807,115.193 154.807,112.332 cw(c152.807,112.332) 154.221,110.918 151.081,107.778 cw(c149.667,109.193) 149.667,107.193 146.807,107.193 146.807,88.443 159.307,88.443 cw(c159.307,87.443) 160.307,87.443 160.307,70.443 cw(c159.307,70.443) 159.307,69.443 146.807,69.443 146.807,50.693 149.667,50.693 cw(c149.667,48.693) 151.081,50.107 154.221,46.967 cw(c152.807,45.553) 154.807,45.553 154.807,42.693 177.807,42.693 cw(c177.807,41.693) 178.807,41.693 178.807,35.193 179.807,34.193 186.307,34.193 187.307,35.193 187.307,41.693 cw(c188.307,41.693) 188.307,42.693 211.307,42.693 211.307,45.553 cw(c213.307,45.553) 211.893,46.967 215.032,50.107 cw(c216.446,48.693) 216.446,50.693 219.307,50.693 219.307,69.443 206.807,69.443 cw(c206.807,70.443) 205.807,70.443 205.807,87.443 cw(c206.807,87.443) 206.807,88.443 219.307,88.443 219.307,107.193 216.446,107.193 cw(c216.446,109.193) 215.032,107.778 211.893,110.918 cw(c213.307,112.332) 211.307,112.332 211.307,115.193 193.557,115.193

## Other copper
VCC:
  pour cut-out: 190.119,77.089 194.056,77.089 195.707,75.438 195.707,64.389 196.215,63.881 196.215,59.436 195.834,59.055 192.786,59.055 192.532,59.309 192.532,67.032 192,67.564 189.103,67.564 188.976,67.691 188.976,75.946

## Silkscreen, mask and mechanical layers (free items; w line width, h text height)
Top Overlay:
  lines w0.127: 147.949,102.969 147.949,89.605 157.607,89.605 ; 148.007,103.007 148.007,89.643 159.307,89.643 159.307,93.376 ; 156.083,100.33 157.099,100.33 ; 172.299,102.655 172.299,113.955 ; 193.757,102.693 197.491,102.693 206.807,93.376
Bottom Overlay:
  circle w0.127: c181.229,34.671 r0.127
  rectangle: 171.196,82.169 188.087,95.631
  lines w0.254: 190.754,54.229 191.516,54.229 ; 191.135,53.975 191.135,54.61
  text "10515.0500_显示板V1.0" at 171.45,45.466 h1.5
  text "20200905H1.2Sn" at 170.434,43.688 h1.5